# Altium PCB FanControllerPCB_Rev2.PcbDoc
Units mm, origin at the board's own origin, x right, y up, seen from the top; angles counter-clockwise.
Board outline 89.28 x 81.53 mm, 2 copper layers (Top Layer, Bottom Layer); 42 components, 35 nets, 158 pads, 23 vias.
Unrouted connection lines stored in the file: 2.
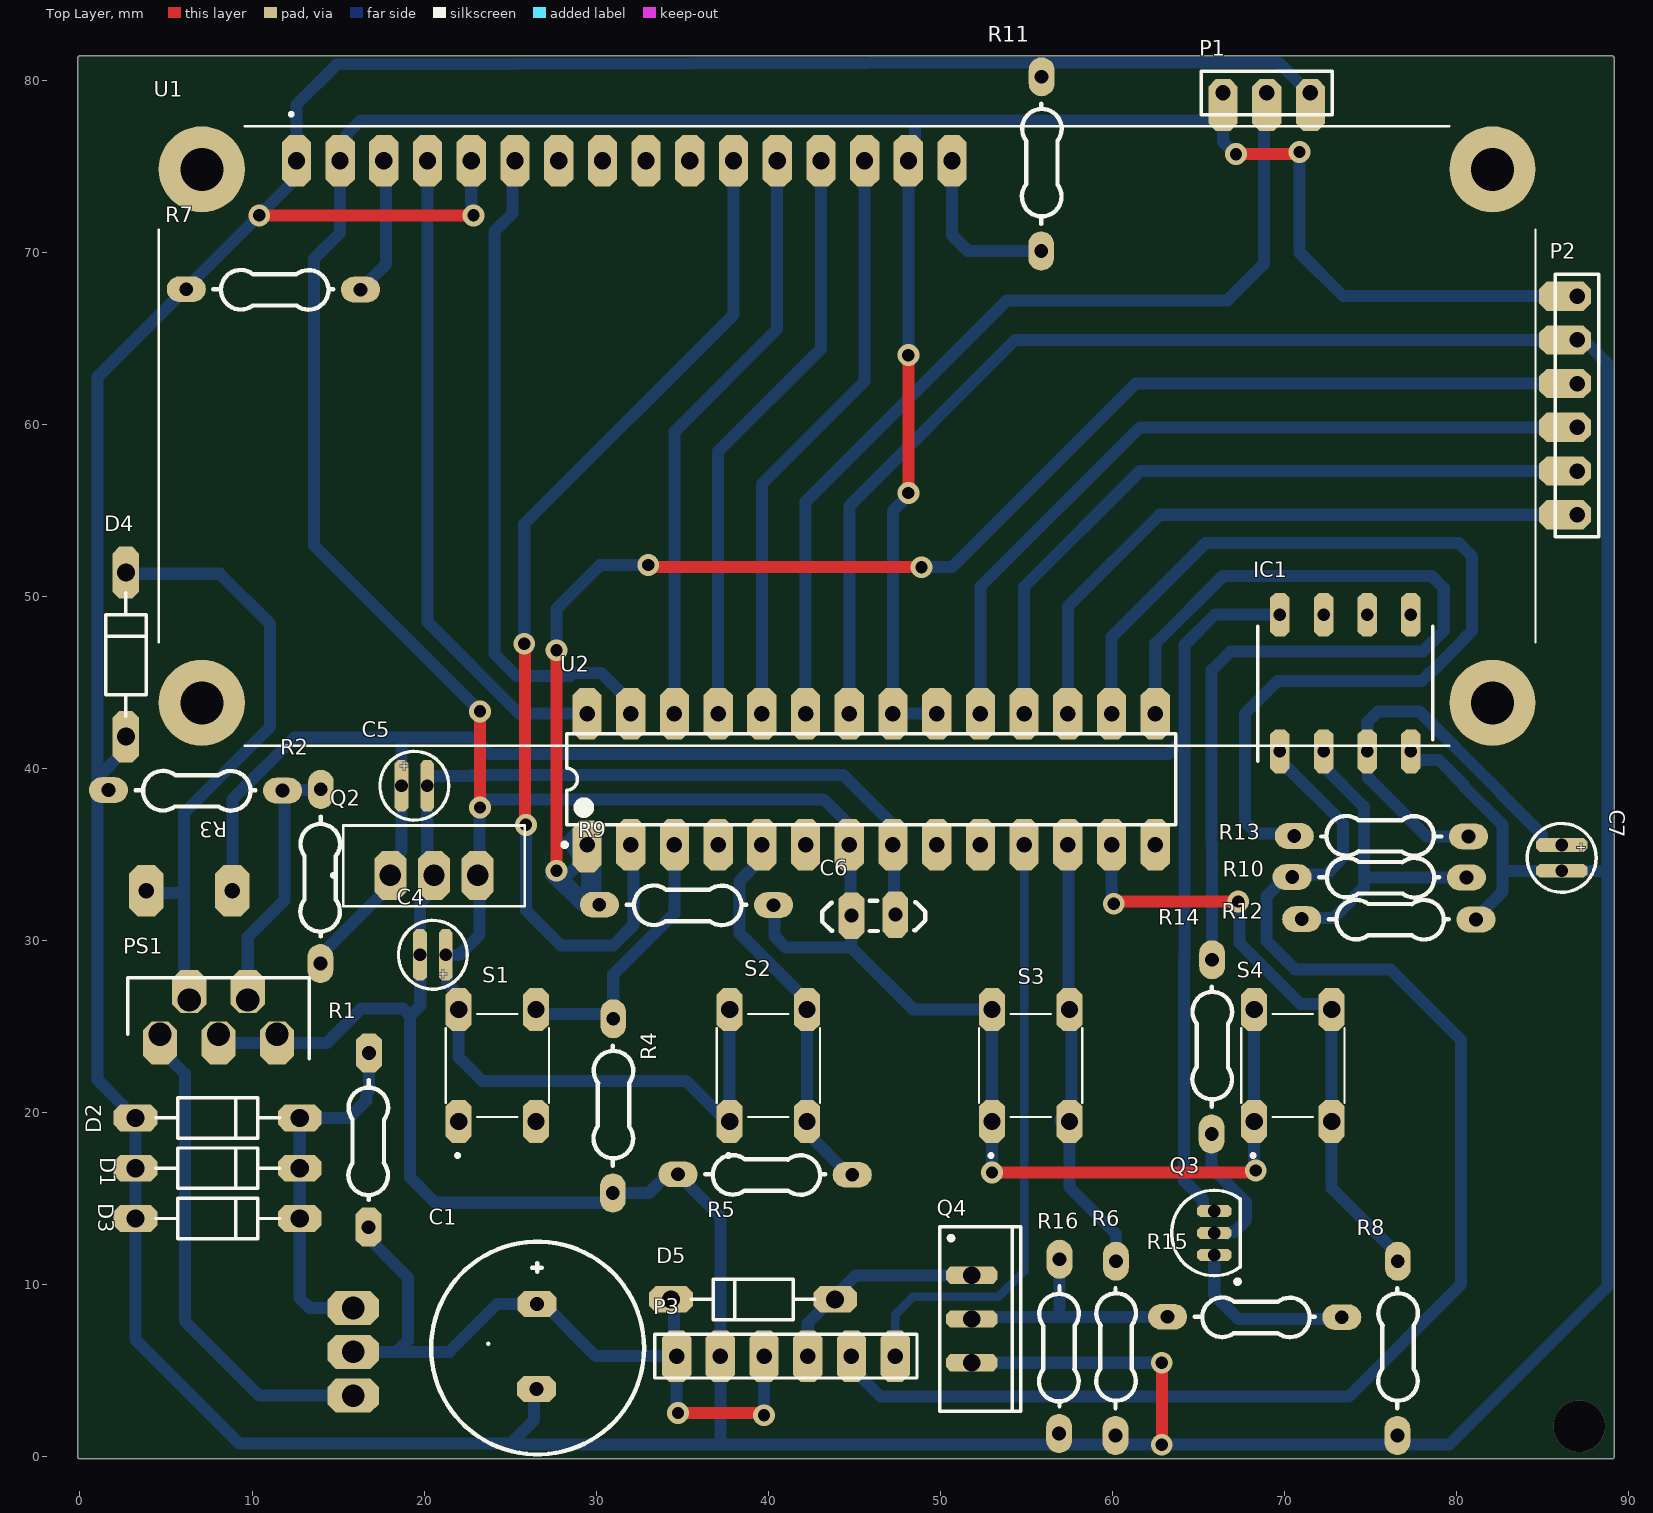
[diagram p0: Top Layer view]
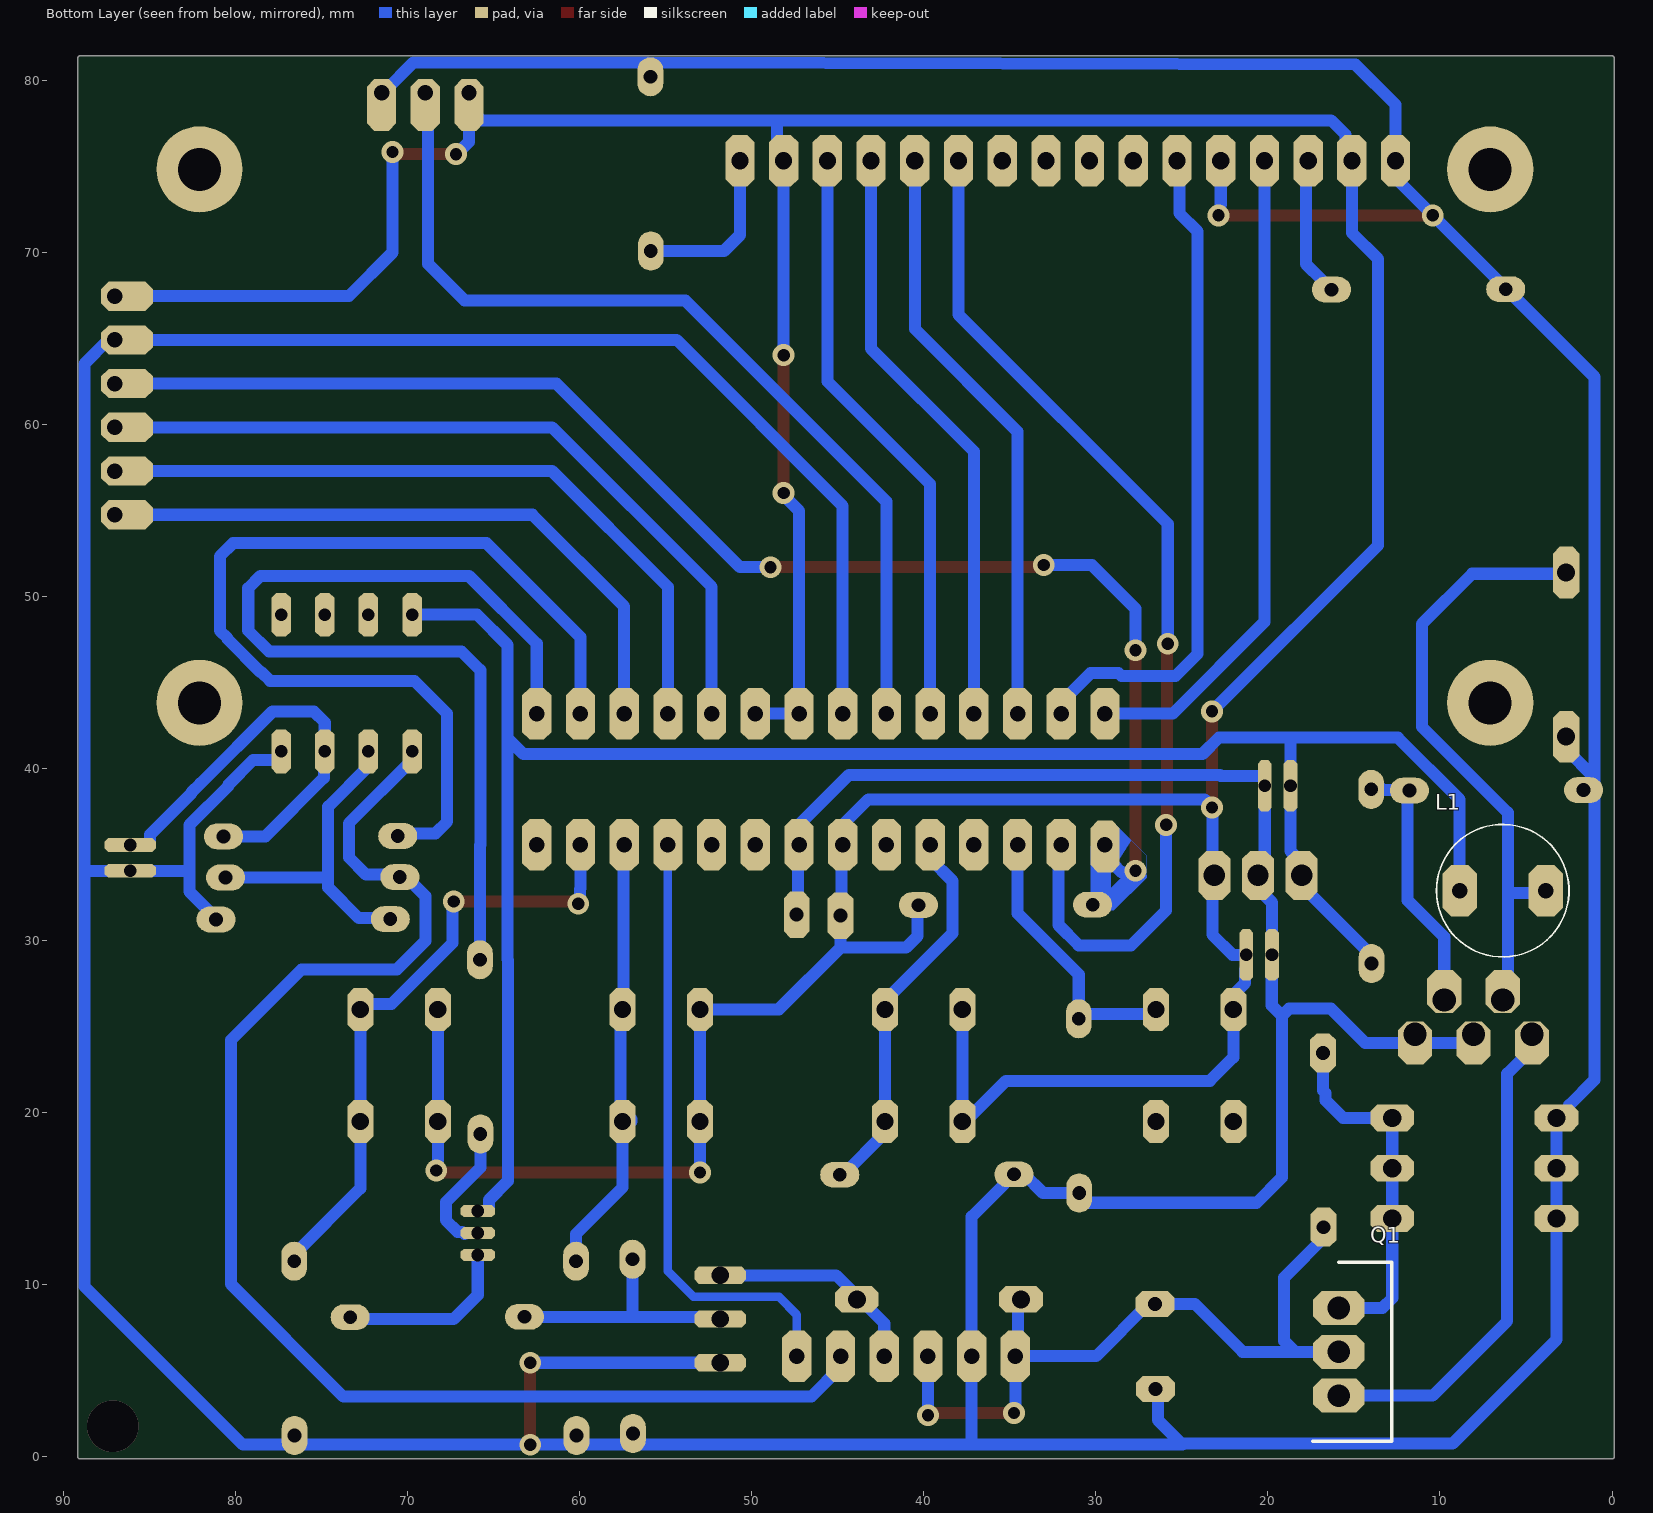
[diagram p1: Bottom Layer view, seen from below]
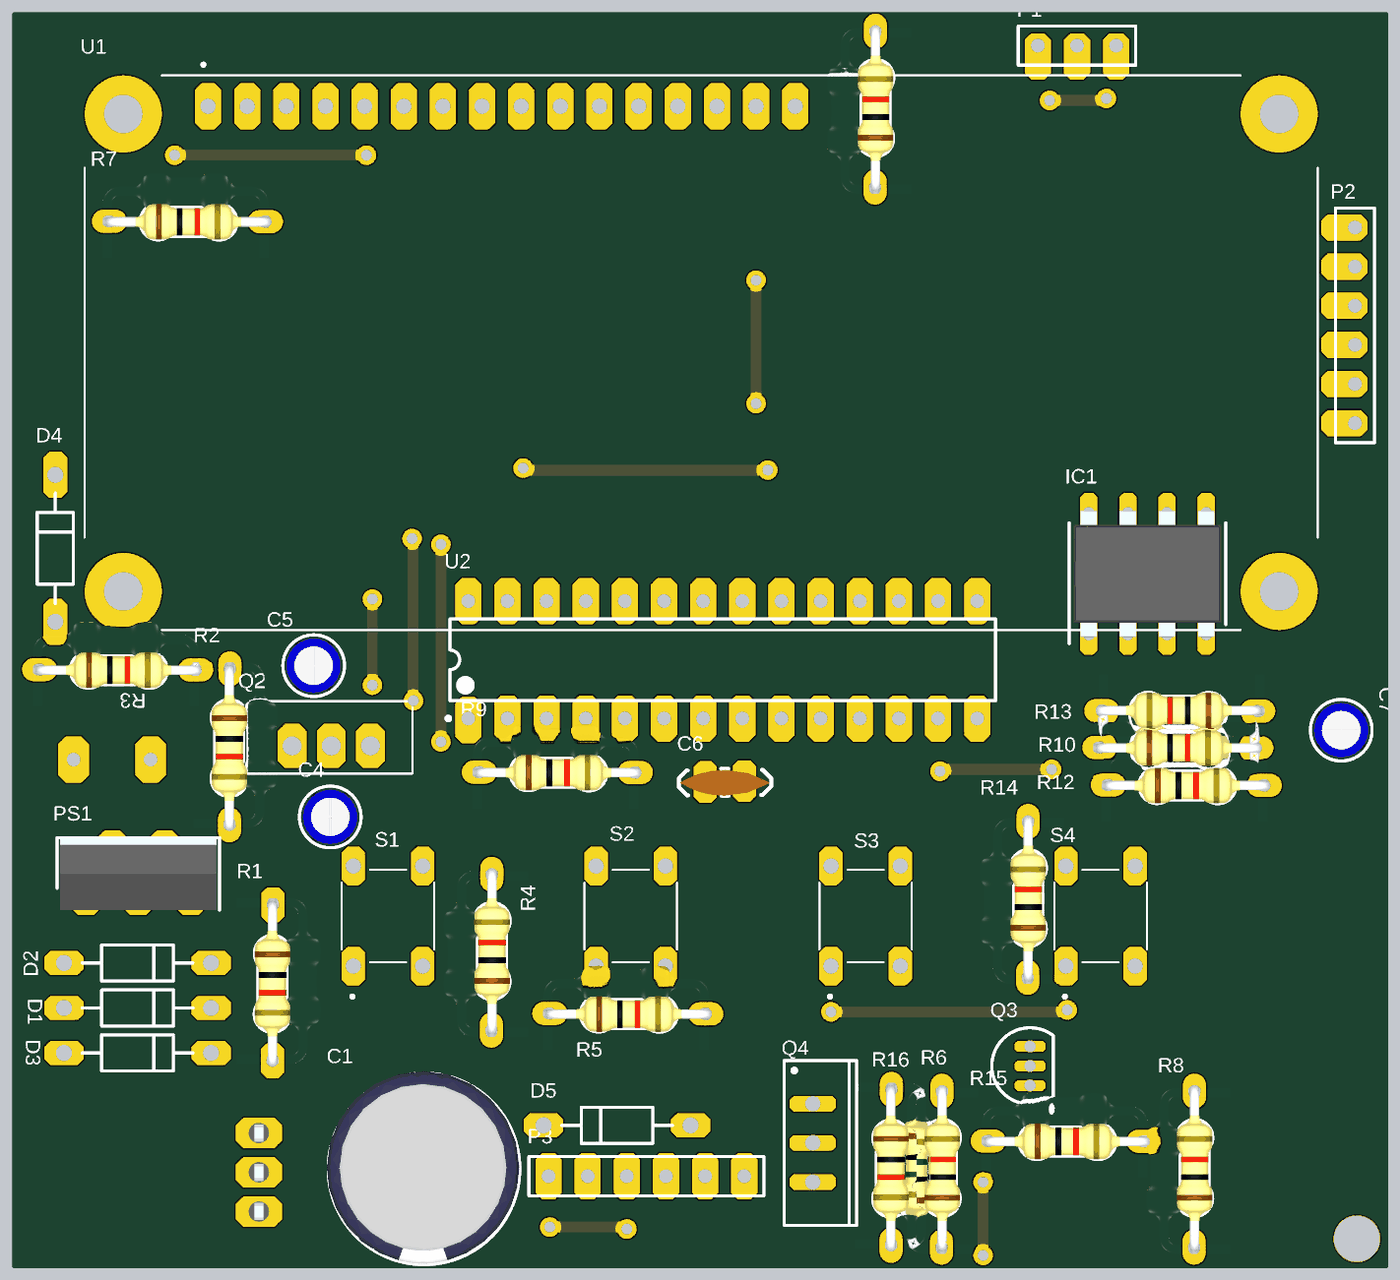
[diagram p2: 3D render of the assembled board from above, using the file's embedded part models]

## Layer stack, top to bottom
Top Solder: solder mask 0.0102, Solder Resist, Dk 3.5
Top Layer: signal copper 0.0356
Dielectric 1: dielectric 0.32, FR-4, Dk 4.8
Bottom Layer: signal copper 0.0356
Bottom Solder: solder mask 0.0102, Solder Resist, Dk 3.5

## Board outline
0,-0.127 cw(c0,0) -0.127,0 -0.127,81.28 cw(c0,81.28) 0,81.407 89.027,81.407 cw(c89.027,81.28) 89.154,81.28 89.154,0 cw(c89.027,0) 89.013,-0.127 cw(c89,0) 89,-0.127

## Design rules (kind name [scope] priority, off if disabled: settings)
Clearance [All] p1: gap=0.5 ignorepadtopadclearanceinfootprint=FALSE
PolygonConnect [All] p1: connectstyle=Relief reliefconductorwidth=0.254 reliefentries=4 polygonreliefangle="90 Angle" airgapwidth=0.254
RoutingVias [All] p1: holewidth=0.711 width=1.27 viastyle="Through Hole" minholewidth=0.711 minwidth=1.27 maxholewidth=0.711 maxwidth=1.27
SolderMaskExpansion [All] p1: expansion=0.102
Width [All] p1: maxlimit=1 minlimit=0.4 preferedwidth=0.7 minimp=50.000000 maximp=50.000000 favimp=50.000000
30 further rules are at their usual default settings.

## Components (designator, comment, footprint, x,y, rotation, side; value= is the part's Value field where it differs from the comment)
C1 "100 μF" "Radial 12.5 x 25" 26.543,6.404 r180 top value="100 µF"
C4 "100 μF" "RADIAL 3.5x7.7" 20.506,29.167 r180 top value="100 µF"
C5 "100 μF" "RADIAL 3.5x7.7" 19.431,38.989 r0 top value="100 µF"
C6 "100 nF" "Ceramic Capacitor 2" 46.101,31.496 r180 top
C7 "100 μF" "RADIAL 3.5x7.7" 86.106,34.798 r270 top value="100 µF"
D1 "Diode Zener" ONSC-AXIAL_LEAD-2-59-10_P#1 8.001,16.764 r180 top
D2 "Diode Zener" ONSC-AXIAL_LEAD-2-59-10_P#1 8.001,19.685 r180 top
D3 "Diode Zener" ONSC-AXIAL_LEAD-2-59-10_P#1 8.001,13.843 r180 top
D4 "1N5822" ONSC-AXIAL_LEAD-2-59-10_P#2 2.667,46.609 r270 top
D5 "1N5822" ONSC-AXIAL_LEAD-2-59-10_P#1 39.116,9.144 r0 top
IC1 "LM358PE4" DIP794W53P254L959H508Q8N 73.533,44.958 r90 top
L1 "WE-FI, 7447018" TSL0709RA-102KR19-PF 6.35,32.893 r0 bottom value=150µH
P1 "Header 3" HDR1X3 66.421,79.248 r0 top
P2 "Header 6" HDR1X6#1 86.995,54.737 r90 top
P3 "Header 6" HDR1X6#2 34.671,5.842 r0 top
PS1 "LM2576-12WT" TO170P470X1016X1900-5P 4.65,24.543 r0 top
Q1 "TIP122" TO255P460X1020X2008-3P 15.875,8.646 r270 bottom
Q2 "LM7805CT/NOPB" TO254P1054X470X2600-3 18.034,33.782 r0 top
Q3 "2N3904" TO-92A 65.913,12.999 r0 top
Q4 "MOSFET-N" TO-220AB 51.816,8.001 r270 top
R1 "Res_Com" "1K Ohm"#1 16.764,18.34 r270 top
R2 "Res_Com" "1K Ohm"#2 13.97,33.655 r270 top
R3 "Res_Com" "1K Ohm"#2 6.776,38.71 r0 top
R4 "Res_Com" "1K Ohm"#2 30.988,20.447 r90 top
R5 "Res_Com" "1K Ohm"#2 39.878,16.383 r0 top
R6 "Res_Com" "1K Ohm"#2 60.198,6.362 r90 top
R7 "Res_Com" "1K Ohm"#2 11.303,67.818 r0 top
R8 "Res_Com" "1K Ohm"#2 76.581,6.362 r90 top
R9 "Res_Com" "1K Ohm"#2 35.306,32.051 r0 top
R10 "Res_Com" "1K Ohm"#2 75.565,33.655 r0 top
R11 "Res_Com" "1K Ohm"#2 55.88,75.185 r90 top
R12 "Res_Com" "1K Ohm"#2 76.118,31.217 r0 top
R13 "Res_Com" "1K Ohm"#2 75.565,36.068 r180 top
R14 "Res_Com" "1K Ohm"#2 65.786,23.876 r90 top
R15 "Res_Com" "1K Ohm"#2 68.326,8.106 r0 top
R16 "Res_Com" "1K Ohm"#2 56.896,6.35 r270 top
S1 "1825967-1" SW_1825967-1 24.257,22.733 r90 top
S2 "1825967-1" SW_1825967-1 40.005,22.733 r90 top
S3 "1825967-1" SW_1825967-1 55.245,22.733 r90 top
S4 "1825967-1" SW_1825967-1 70.485,22.733 r90 top
U1 "LCD2X16" LCD_LCD2X16 44.577,59.309 r0 top
U2 "ATmega8A-PU" 28P3 45.974,39.37 r90 top

## Footprints (in the part's own frame and the unit in brackets; to place one, negate y for a bottom-side part, rotate by r counter-clockwise, add the part's x,y. Pads: shape width x height; smd on the part's side, far side on the other; paste and mask are expansions set on the pad)
"1K Ohm"#1 [mm] "RESISTENCIA DE 1/4 W DE 1K OHM"
  oct 2.27x1.5 hole 0.8: 1(-5.125,0.025) 2(5,0)
  silkscreen extent -3.55,-1.17 3.42,1.14, body extent -5.56,-2.35 5.38,3.13, height 2.93
"1K Ohm"#2 [mm] "RESISTENCIA DE 1/4 W DE 1K OHM"
  oval 2.27x1.5 hole 0.8: 1(-5.125,0.025) 2(5,0)
  silkscreen extent -3.55,-1.17 3.42,1.14, body extent -5.56,-2.35 5.38,3.13, height 2.93
28P3 [mm] "28-Pin Plastic Dual In-Line Package (PDIP)"
  oct 3x1.7 hole 0.9 copper offset -0.1,0: 1(-3.81,16.51)
  oct 3x1.7 hole 0.9: 2(-3.81,13.97) 3(-3.81,11.43) 4(-3.81,8.89) 5(-3.81,6.35) 6(-3.81,3.81) 7(-3.81,1.27) 8(-3.81,-1.27) 9(-3.81,-3.81) 10(-3.81,-6.35) 11(-3.81,-8.89) 12(-3.81,-11.43) 13(-3.81,-13.97) 14(-3.81,-16.51) 15(3.81,-16.51) 16(3.81,-13.97) 17(3.81,-11.43) 18(3.81,-8.89) 19(3.81,-6.35) 20(3.81,-3.81) 21(3.81,-1.27) 22(3.81,1.27) 23(3.81,3.81) 24(3.81,6.35) 25(3.81,8.89) 26(3.81,11.43) 27(3.81,13.97) 28(3.81,16.51)
  silkscreen extent -3.93,-17.7 2.65,17.93, body extent -3.6,-17.65 3.6,17.65, height 4.58
"Ceramic Capacitor 2" [mm] "CAPACITOR CERAMICO"
  oct 1.5x2.7 hole 0.813: 1(-1.276,0) 2(1.264,0.054)
  silkscreen extent -3.03,-0.8 2.98,0.95, body extent -2.93,-0.74 2.91,0.96, height 6.92
DIP794W53P254L959H508Q8N [mm]
  oct 2.55x1.13 hole 0.73: 1(-3.97,3.81) 2(-3.97,1.27) 3(-3.97,-1.27) 4(-3.97,-3.81) 5(3.97,-3.81) 6(3.97,-1.27) 7(3.97,1.27) 8(3.97,3.81)
  silkscreen extent -4.53,-5.08 3.3,5.08, body extent -4.1,-4.79 4.1,4.79, height 5.08
HDR1X3 [mm] "Connector; Header; 3 Position"
  oct 1.7x3 hole 0.9 copper offset 0,-0.7: 1(0,0) 2(2.54,0) 3(5.08,0)
  silkscreen extent -1.27,-1.27 6.35,1.27
HDR1X6#1 [mm] "Connector; Header; 6 Position"
  oct 1.7x3 hole 0.9 copper offset 0,0.7: 1(0,0) 2(2.54,0) 3(5.08,0) 4(7.62,0) 5(10.16,0) 6(12.7,0)
  silkscreen extent -1.27,-1.27 13.97,1.27
HDR1X6#2 [mm] "Connector; Header; 6 Position"
  oct 1.7x3 hole 0.9: 1(0,0) 2(2.54,0) 3(5.08,0) 4(7.62,0) 5(10.16,0) 6(12.7,0)
  silkscreen extent -1.27,-1.27 13.97,1.27
LCD_LCD2X16 [mm]
  oct 1.7x3 hole 1: 1(-32,16) 2(-29.46,16) 3(-26.92,16) 4(-24.38,16) 5(-21.84,16) 6(-19.3,16) 7(-16.76,16) 8(-14.22,16) 9(-11.68,16) 10(-9.14,16) 11(-6.6,16) 12(-4.06,16) 13(-1.52,16) 14(1.02,16) 15(3.56,16) 16(6.1,16)
  round 5 hole 2.5: S1(-37.5,15.5) S2(37.5,15.5) S3(37.5,-15.5) S4(-37.5,-15.5)
  silkscreen extent -40,-18 40,18.8
ONSC-AXIAL_LEAD-2-59-10_P#1 [mm] "AXIAL, 2-Leads, Diameter 2.35mm"
  oct 2.55x1.55 hole 1.05: 1(-4.77,0) 2(4.77,0)
  silkscreen extent -3.59,-1.17 3.59,1.17
ONSC-AXIAL_LEAD-2-59-10_P#2 [mm] "AXIAL, 2-Leads, Diameter 2.35mm"
  oct 3x1.55 hole 1.05: 1(-4.77,0) 2(4.77,0)
  silkscreen extent -3.59,-1.17 3.59,1.17
"RADIAL 3.5x7.7" [mm] "Capacitor  Electrolitico Radial 3.5mm diametro  x 7.7mm de altura (1.5mm entre pines)"
  oct 0.8x3 hole 0.75: 1(-0.75,0) 2(0.75,0)
  silkscreen extent -2,-2 2,2, body extent -1.78,-1.78 1.77,1.77, height 8.53
"Radial 12.5 x 25" [mm] "Capacitor  Electrolitico Radial 12.5mm diametro  x 25mm de altura (5mm entre pines)"
  oct 2.27x1.5 hole 0.8: 1(-0.012,-2.476) 2(0.013,2.477)
  silkscreen extent -6.24,-6.1 6.14,6.27, body extent -6.24,-6.26 6.26,6.24, height 26.49
SW_1825967-1 [mm]
  oct 2.508x1.508 hole 1: 1(-3.25,2.25) 2(3.25,2.25) 3(-3.25,-2.25) 4(3.25,-2.25)
  silkscreen extent -5.33,-3 3,3
TO170P470X1016X1900-5P [mm]
  oct 2x2.5 hole 1.35 copper offset 0,-0.5: 1(0,0) 3(3.4,0) 5(6.8,0)
  oct 2x2.5 hole 1.35 copper offset 0,0.5: 2(1.7,2) 4(5.1,2)
  silkscreen extent -1.87,-1.42 8.67,3.28, body extent -1.68,-1.42 8.48,3.28, height 17.61
TO254P1054X470X2600-3 [mm]
  oct 1.86x2.86 hole 1.24: 1(0,0) 2(2.54,0) 3(5.08,0)
  silkscreen extent -3.41,-1.8 7.81,2.9
TO255P460X1020X2008-3P [mm]
  oct 1.98x3 hole 1.32: 1(0,0) 2(2.55,0) 3(5.1,0)
  silkscreen extent -2.65,-1.53 7.75,3.07, body extent -2.55,-1.53 7.65,3.07, height 19.21
TO-92A [mm] "TO, Flat Index; 3 In-Line, Axial Leads; Body Dia. 4.5mm; Leads 0.51 x 0.48 mm (max)"
  oct 2x0.7 hole 0.75: 1(0,-1.27) 2(0,0) 3(0,1.27)
  silkscreen extent -2.48,-2.95 1.5,2.48, body extent -2.48,-2.5 1.5,2.5, height 6.86
TO-220AB [mm] "TO, Thru-Hole, Vertical, Heatsink Mounted; 3 In-Line Leads; Pitch 2.54 mm"
  oct 1x3 hole 1: 1(-2.54,0) 2(0,0) 3(2.54,0)
  silkscreen extent -5.35,-1.85 5.35,2.85, body extent -5.4,-1.9 5.4,2.9, height 19.3
TSL0709RA-102KR19-PF [mm]
  oct 2x3 hole 0.89: 1(-2.5,0) 2(2.5,0)
  silkscreen extent -3.85,-3.85 3.85,3.85

## Part data
C1 C4 C5 C7: library part "Electrolitic Capacitor, Thru-Hole", "Electrolitic Capacitor, Thru-Hole", Contact=cynetik_group@hotmail.com, Created by="Zion Blue", Published="28 April 2014", Publisher="Cynetik Group"
C6: library part "Ceramic Capacitor, Thru-Hole.", "Ceramic Capacitor, Thru-Hole", Contact=cynetik_group@hotmail.com, Created by="Zion Blue", Published="28 April 2014", Publisher="Cynetik Group"
D4 D5: "Diode", Manufacturer_Name="HY Electronic Corp", Datasheet Link=https://docs.rs-online.com/7b99/0900766b814bbef7.pdf, Manufacturer_Part_Number=1N5822
IC1: "Integrated Circuit", Manufacturer_Name="Texas Instruments", Mouser Part Number=595-LM358PE4, Arrow Part Number=LM358PE4, Arrow Price/Stock=https://www.arrow.com/en/products/lm358pe4/texas-instruments, Datasheet Link=http://www.ti.com/lit/ds/symlink/lm358.pdf, Height=5.08mm, Manufacturer_Part_Number=LM358PE4, Mouser Price/Stock=https://www.mouser.co.uk/ProductDetail/Texas-Instruments/LM358PE4?qs=VBduBm9rCJTWtuRHSrRjAg%3D%3D
L1: "WE-FI Leaded Toroidal Line Choke, L = 150µH", Manufacturer="Wurth Elektronik", partNo=7447018, ComponentLink1Description=Manufacturer, ComponentLink1URL=http://www.we-online.de, ComponentLink2Description=Datasheet, ComponentLink2URL=http://katalog.we-online.de/pbs/datasheet/7447018.pdf, Created by="Baojun Chen", Created Date=Feb.2016
P1: "Header, 3-Pin", LatestRevisionDate=17-Jul-2002, LatestRevisionNote="Re-released for DXP Platform.", Publisher="Altium Limited"
P2 P3: "Header, 6-Pin", LatestRevisionDate=17-Jul-2002, LatestRevisionNote="Re-released for DXP Platform.", Publisher="Altium Limited"
PS1: "Power Supply", Manufacturer_Name=Microchip, Mouser Part Number=998-LM2576-12WT, Arrow Part Number=LM2576-12WT, Arrow Price/Stock=https://www.arrow.com/en/products/lm2576-12wt/microchip-technology, Datasheet Link=http://ww1.microchip.com/downloads/en/DeviceDoc/lm2576.pdf, Height=4.7mm, Manufacturer_Part_Number=LM2576-12WT, Mouser Price/Stock=https://www.mouser.co.uk/ProductDetail/Microchip-Technology-Micrel/LM2576-12WT?qs=kh6iOki%2FeLFUlIqd4u5Ybw%3D%3D
Q1: "Transistor BJT NPN", Manufacturer_Name=STMicroelectronics, Mouser Part Number=511-TIP122, Arrow Part Number=TIP122, Arrow Price/Stock=https://www.arrow.com/en/products/tip122/stmicroelectronics, Datasheet Link=http://www.st.com/web/en/resource/technical/document/datasheet/CD00000911.pdf, Height=4.6mm, Manufacturer_Part_Number=TIP122, Mouser Price/Stock=https://www.mouser.co.uk/ProductDetail/STMicroelectronics/TIP122?qs=ljbEvF4DwOPuWPwhe20bIQ%3D%3D
Q2: "Linear Voltage Regulator IC 1 Output 1A TO-220-3", Package="TO-220 ON Semiconductor", Availability=Unavailable, MF="ON Semiconductor", MP=LM7805CT, Price=None, SnapEDA_Link=https://www.snapeda.com/parts/LM7805CT/ON%20Semiconductor/view-part/546231/?ref=snap
Q3: "NPN General Purpose Amplifier", ComponentLink1Description="Manufacturer Link", ComponentLink1URL=http://www.fairchildsemi.com/, ComponentLink2Description=Datasheet, ComponentLink2URL=http://www.fairchildsemi.com/ds/2N%2F2N3904.pdf, DatasheetVersion=1997, LatestRevisionDate=15-Jan-2003, LatestRevisionNote="PCB Footprint 'BCY-W3/D4.7' replaced", PackageDescription="TO, Flat Index; 3 In-Line, Axial Leads; Body Dia. 4.5mm; Leads 0.51 x 0.48 mm (max)", PackageReference=TO-92A, PackageVersion=Sep-1998, Published=8-Jun-2000, Publisher="Altium Limited"
Q4: "N-Channel MOSFET", LatestRevisionDate=17-Jul-2002, LatestRevisionNote="Re-released for DXP Platform.", PackageDescription="TO, Flat Index; 3 In-Line, Axial Leads; Body Dia. 4.6mm; Lead Dia. 0.5 mm (max)", PackageReference=E3, PackageVersion=1995/1996, Published=8-Jun-2000, Publisher="Altium Limited"
S1 S2 S3 S4: "Switch Tactile OFF (ON) SPST Round Button PC Pins 0.05A 24VDC 1.57N Thru-Hole", Package=None, Availability=Warning, BuyPart=https://www.snapeda.com/parts/1825967-1/TE%20Connectivity%20/%20DEUTSCH/view-part/398388/?ref=eda, DigiKey-Purchase-URL=https://snapeda.com/shop?store=DigiKey&id=398388, MF="TE Connectivity", Mouser-Purchase-URL=https://snapeda.com/shop?store=Mouser&id=398388, MP=1825967-1, Price=None, SnapEDA_Link=https://www.snapeda.com/parts/1825967-1/TE%20Connectivity%20/%20DEUTSCH/view-part/398388/?ref=snap
U1: "Display; Display: LCD 2x16 characters (blue backlight)", Package=None, Availability=Unavailable, MF=mikroElektronika, MP=LCD2X16, Price=None, SnapEDA_Link=https://www.snapeda.com/parts/LCD2X16/mikroElektronika/view-part/2472530/?ref=snap
U2: "8-bit AVR Microcontroller, 2.7-5.5V, 16MHz, 8KB Flash, 512 Bytes EEPROM, 1KB SRAM, 28-pin PDIP, Industrial Grade (-40°C to 85°C)", ComponentLink1Description="Manufacturer URL", ComponentLink1URL=http://www.atmel.com/, ComponentLink2Description="ATmega8A Datasheet", ComponentLink2URL=http://www.atmel.com/dyn/resources/prod_documents/doc8159.pdf, ComponentLink3Description="ATmega8A Summary", ComponentLink3URL=http://www.atmel.com/dyn/resources/prod_documents/8159S.pdf, DatasheetVersion="revD, Feb-2011", PackageDescription="28-lead (0.300\"/7.62mm Wide) Plastic Dual Inline Package (PDIP)", PackageReference=28P3, PackageVersion="revB, Sep-2001"

## Via types
v1: diameter 1.27, hole 0.711, Top Layer to Bottom Layer, 22 vias
v2: diameter 3, hole 3, Top Layer to Bottom Layer, 1 vias

## Nets (pads, with @x,y where several pads share a name; then routed paths per layer and width w, separated by ;. In a path a pad name is that pad's centre, name@x,y a point inside that pad or via, vN(x,y) a via of type N, cw(c..) or ccw(c..) an arc to the next point about the centre after c; other vN are vias at no path point)
12V: C5.1 IC1.8 L1.2 Q2.1 Q3.3 R2.2 | length 118.3
  Bottom Layer w0.7: L1.2 8.85,38.187 12.446,41.783 16.891,41.783 18.669,41.783 ; R2.2 13.97,29.129 14.097,29.256 18.034,33.193 Q2.1 18.034,34.542 18.681,35.189 C5.1 18.681,41.771 18.669,41.783 ; Q3.3 65.263,14.269 65.263,14.919 64.161,16.021 64.161,28.875 64.184,28.898 64.184,41.753 ; IC1.8 65.946,48.928 64.184,47.166 64.184,41.753 ; 18.669,41.783 22.845,41.783 23.798,40.83 63.261,40.83 64.184,41.753
+5V: C4.1 C6.2 P1.1 P2.6 Q2.3 R9.2 S1.1 S1.2 S2.1 S2.2 S3.1 S3.2 S4.1 S4.2 U1.2 U1.15 U2.7 U2.20 U2.21 | length 283.5
  Top Layer w0.7: v1(23.241,37.726) v1(23.241,43.314) ; v1(48.137,56.007) v1(48.137,64.012) ; v1(52.995,16.51) 68.199,16.51 v1(68.326,16.637) ; v1(67.183,75.692) 70.358,75.692 70.376,75.71 70.757,75.71 v1(70.866,75.819)
  Bottom Layer w0.7: C4.1 22.055,29.167 23.222,30.334 23.222,33.782 v1@23.222,37.745 ; C4.1@21.324,28.321 21.324,27.519 22.007,26.836 S1.2 22.007,23.205 23.368,21.844 35.214,21.844 37.755,19.303 S2.1@37.755,18.975 ; v1(23.241,37.726) v1@23.222,37.745 ; v1(23.241,43.314) 13.589,52.966 13.589,69.596 15.117,71.124 U1.2 15.498,75.69 15.498,76.839 16.318,77.659 48.518,77.659 ; S2.1 S2.2 ; R9.2 40.361,31.996 40.361,30.251 41.021,29.591 44.837,29.591 ; U2.7 44.77,35.494 44.77,31.509 C6.2 44.837,29.591 ; U2.7@44.704,36.068 44.704,36.718 43.219,38.203 23.68,38.203 v1@23.222,37.745 ; v1(48.137,56.007) 48.137,55.853 47.244,54.96 U2.21 U2.20 ; v1(48.137,64.012) U1.15 48.518,75.69 48.518,77.659 ; v1(52.995,16.51) S3.1 S3.2 48.41,25.983 48.41,26.012 44.837,29.585 44.837,29.591 ; P1.1@66.267,78.245 65.681,77.659 48.518,77.659 ; P1.1@66.575,78.118 66.575,79.094 P1.1 66.421,76.409 67.138,75.692 v1(67.183,75.692) ; S4.2 S4.1 68.235,17.236 v1(68.326,16.637) ; v1(70.866,75.819) 70.866,69.977 73.406,67.437 P2.6
+48V: C1.1 D5.1 P3.1 P3.3 Q1.2 R1.2 | length 44.6
  Top Layer w0.7: v1(34.753,2.54) 39.624,2.54 v1(39.751,2.413)
  Bottom Layer w0.7: Q1.2 18.415,6.096 ; R1.2@16.51,12.955 19.05,10.415 19.05,6.731 18.415,6.096 ; D5.1 34.509,8.981 34.509,6.004 P3.1 ; v1(34.753,2.54) 34.671,2.622 P3.1 ; v1(39.751,2.413) P3.3 ; 18.415,6.096 21.463,6.096 24.247,8.88 C1.1 26.94,8.88 29.979,5.842 P3.1
-48V: C1.2 C4.2 C5.2 C6.1 C7.2 D1.2 D2.2 D3.2 D4.2 IC1.4 P1.3 P2.5 P3.2 PS1.3 PS1.5 Q2.2 Q4.3 R3.1 R4.1 R5.1 R6.1 R7.1 R8.1 R11.2 R12.2 R16.2 U1.1 U1.5 U2.8 U2.22 | length 506.6
  Top Layer w0.7: v1(10.414,72.136) v1(22.86,72.136) ; v1(62.865,0.698) v1(62.865,5.461)
  Bottom Layer w0.7: R3.1 R3.1@1.016,38.735 ; D4.2 2.667,41.114 1.016,39.463 ; PS1.3 8.55,24.043 10.95,24.043 PS1.5 11.95,24.043 14.34,24.043 16.332,26.035 18.767,26.035 19.177,25.625 ; C4.2 19.756,32.204 20.574,33.022 Q2.2 20.181,34.175 C5.2 20.181,39.518 20.231,39.568 22.737,39.568 22.787,39.618 44.344,39.618 47.244,36.718 U2.8@47.244,36.068 ; C4.2@19.774,28.321 19.774,26.222 19.177,25.625 ; U1.5 22.737,72.759 22.751,72.745 22.751,72.245 v1(22.86,72.136) ; C1.2 26.384,3.781 26.384,2.127 25.019,0.762 ; U2.22 44.704,55.245 54.356,64.897 P2.5 87.375,64.897 88.772,63.5 88.772,34.163 ; U2.8 47.31,35.494 47.31,31.562 C6.1 ; Q4.3 v1(62.865,5.461) ; 68.58,81.025 69.647,81.025 71.297,79.375 P1.3@71.347,79.375 ; 68.733,81.024 56.033,81.024 14.913,80.898 12.577,78.562 U1.1 12.577,74.299 v1(10.414,72.136) 1.016,62.738 1.016,39.463 ; IC1.4 77.343,40.708 77.558,40.493 78.958,40.493 80.391,39.06 80.391,38.99 82.675,36.706 82.675,33.909 ; R12.2@80.61,31.344 R12.2@80.995,31.344 ; R12.2@80.95,31.115 82.675,32.84 82.675,33.909 ; R3.1@1.016,38.735 1.016,39.463 ; R3.1@1.016,38.735 1.016,21.9 2.488,20.428 2.488,20.11 2.913,19.685 D2.2 D1.2 D3.2 3.231,6.802 9.271,0.762 25.019,0.762 ; 19.177,25.625 19.177,16.232 20.652,14.757 30.567,14.757 30.963,15.153 R4.1 33.066,15.322 34.152,16.408 R5.1 34.922,16.408 35.291,16.038 35.291,15.87 37.211,13.95 P3.2 37.211,0.952 37.465,0.698 ; 25.019,0.762 24.955,0.698 37.465,0.698 ; 37.465,0.698 v1(62.865,0.698) 79.565,0.698 88.772,9.905 88.772,34.163 ; 82.675,33.909 82.814,34.048 C7.2 88.657,34.048 88.772,34.163
Analog: P1.2 U2.23 | length 55
  Bottom Layer w0.7: U2.23 42.164,55.499 53.848,67.183 66.675,67.183 68.807,69.315 P1.2@68.807,79.121 ; P1.2@68.58,79.121 P1.2@68.807,79.121 ; P1.2@68.807,79.375 P1.2@68.807,79.121 ; P1.2@68.834,79.121 P1.2@68.807,79.121
B1: R4.2 S1.3 S1.4 U2.3 | length 16.3
  Bottom Layer w0.7: S1.4 26.775,25.715 30.72,25.715 R4.2 30.988,28.021 34.544,31.577 U2.3
B2: R5.2 S2.3 S2.4 U2.5 | length 22.5
  Bottom Layer w0.7: U2.5 39.624,34.756 38.321,33.453 38.321,30.417 42.255,26.483 S2.4 S2.3 42.255,18.811 44.683,16.383 R5.2
B3: R6.2 S3.3 S3.4 U2.12 | length 25.5
  Bottom Layer w0.7: S3.3@56.987,19.483 S3.3@56.987,19.61 ; U2.12 57.449,35.515 57.449,26.029 S3.4 ; S3.4@57.458,25.912 57.622,25.826 S3.3@57.622,19.483 ; S3.3 57.495,15.657 60.198,12.954 R6.2
B4: R8.2 S4.3 S4.4 U2.13 | length 36.4
  Top Layer w0.7: v1(60.071,32.131) 60.198,32.258 v1(67.31,32.258)
  Bottom Layer w0.7: U2.13 59.944,33.01 59.962,32.992 59.962,32.24 v1(60.071,32.131) ; v1(67.31,32.258) 67.386,32.182 67.386,29.843 70.931,26.298 72.42,26.298 S4.4 S4.3 72.735,15.593 76.581,11.747 R8.2
E: U1.6 U2.27 | length 38.1
  Bottom Layer w0.7: U1.6@25.146,74.469 25.146,72.263 24.077,71.194 24.077,46.659 25.358,45.378 28.516,45.378 28.668,45.53 30.304,45.53 32.004,43.83 U2.27
Gate: R14.2 U2.15 | length 56.5
  Bottom Layer w0.7: U2.15 62.484,47.244 66.421,51.181 78.542,51.181 79.248,50.475 79.248,48.006 78.045,46.803 66.862,46.803 65.761,45.702 65.761,35.56 65.786,35.535 R14.2
LCD4: U1.11 U2.2 | length 61
  Top Layer w0.7: v1(25.818,47.244) 25.863,47.199 25.863,36.763 v1(25.908,36.718)
  Bottom Layer w0.7: v1(25.818,47.244) 25.818,54.206 37.977,66.365 U1.11 ; v1(25.908,36.718) 25.908,31.75 27.94,29.718 30.988,29.718 32.166,30.896 32.166,35.398 U2.2
LCD5: U1.12 U2.26 | length 34.6
  Bottom Layer w0.7: U2.26 34.544,59.563 40.517,65.536 U1.12
LCD6: U1.13 U2.25 | length 34.6
  Bottom Layer w0.7: U2.25 37.084,58.42 43.057,64.393 U1.13
LCD7: U1.14 U2.24 | length 34.6
  Bottom Layer w0.7: U2.24 39.624,56.515 45.597,62.488 U1.14
MISO: P2.2 U2.18 | length 42.5
  Bottom Layer w0.7: U2.18 54.864,50.546 61.595,57.277 P2.2@87.249,57.277
MOSI: P2.1 U2.17 | length 38.3
  Bottom Layer w0.7: U2.17 57.404,49.403 62.738,54.737 P2.1 P2.1@87.249,54.737
NetC7_1: C7.1 IC1.3 R13.1 | length 25.6
  Bottom Layer w0.7: R13.1 78.257,36.043 74.853,39.447 74.853,40.938 IC1.3 74.803,42.672 75.438,43.307 77.841,43.307 82.042,39.106 82.545,38.603 82.545,38.557 84.956,36.146 84.956,35.598 85.006,35.548 C7.1
NetD1_K: D1.1 D2.1 D3.1 Q1.1 R1.1 | length 20.9
  Bottom Layer w0.7: Q1.1 13.335,8.646 12.771,9.21 D3.1 D1.1 D2.1 15.621,19.685 16.637,20.701 16.637,21.128 16.789,21.28 R1.1
NetD4_1: D4.1 L1.1 PS1.2 | length 36
  Bottom Layer w0.7: D4.1 2.667,51.042 2.933,51.308 8.128,51.308 11.049,48.387 11.049,42.418 6.052,37.421 6.052,32.766 6.052,26.841 PS1.2 ; L1.1 3.977,32.766 5.755,32.766
NetD5_2: D5.2 P3.4 Q4.1 | length 12.6
  Bottom Layer w0.7: P3.4 42.291,7.747 45.085,10.541 Q4.1
NetIC1_2: IC1.2 R10.2 R12.1 | length 19.2
  Bottom Layer w0.7: R12.1@70.993,31.293 72.822,31.293 74.606,33.077 74.606,33.655 ; IC1.2 72.263,40.113 74.606,37.77 74.606,33.655 ; R10.2 74.606,33.655
NetPS1_1: PS1.1 Q1.3 | length 28.8
  Bottom Layer w0.7: PS1.1 4.65,23.7 6.096,22.254 6.096,7.874 10.424,3.546 Q1.3
NetPS1_4: PS1.4 R2.1 R3.2 | length 15.5
  Bottom Layer w0.7: PS1.4 9.75,30.197 11.874,32.322 11.874,38.612 R3.2 11.811,38.745 R2.1@13.345,38.745 ; R2.1@13.485,38.885 R2.1@13.345,38.745 ; R2.1 13.96,38.745 R2.1@13.345,38.745
NetQ3_1: Q3.1 R15.2 | length 10.2
  Bottom Layer w0.7: Q3.1 65.913,9.398 67.31,8.001 72.818,8.001 R15.2@73.072,8.255
NetQ3_2: Q3.2 R14.1 | length 7.3
  Bottom Layer w0.7: R14.1 65.761,16.798 67.763,14.796 67.763,13.742 67.09,13.069 66.815,13.069 Q3.2@66.675,12.929
NetQ4_2: Q4.2 R15.1 R16.1 | length 14.6
  Bottom Layer w0.7: Q4.2 51.921,8.106 56.921,8.106 ; R16.1 56.921,8.106 ; R15.1@62.947,8.28 62.773,8.106 56.921,8.106
NetR7_2: R7.2 U1.3 | length 8.3
  Bottom Layer w0.7: R7.2 16.472,67.818 16.841,68.188 16.841,68.356 17.78,69.295 17.78,75.186 U1.3
NetR11_1: R11.1 U1.16 | length 10
  Bottom Layer w0.7: U1.16@50.761,75.393 U1.16 50.677,70.989 51.606,70.06 R11.1
PWM: IC1.1 P3.5 R10.1 | length 83
  Bottom Layer w0.7: P3.5 44.831,5.192 46.531,3.492 73.723,3.492 80.264,10.033 80.264,24.205 76.148,28.321 70.605,28.321 68.961,29.965 68.961,32.586 70.055,33.68 R10.1 70.593,33.833 72.412,33.833 73.406,34.827 73.406,36.805 69.723,40.488 IC1.1
PWM5: R13.2 U2.16 | length 57
  Bottom Layer w0.7: U2.16 59.944,47.625 65.405,53.086 80.137,53.086 80.899,52.324 80.899,48.006 80.448,47.555 80.448,47.509 78.542,45.603 78.496,45.603 77.978,45.085 69.596,45.085 67.691,43.18 67.691,36.902 68.38,36.213 70.42,36.213 R13.2
RS: U1.4 U2.28 | length 38.3
  Bottom Layer w0.7: U1.4 20.197,48.51 25.527,43.18 U2.28
RST: P2.4 R9.1 U2.1 | length 85.9
  Top Layer w0.7: v1(27.686,34.048) v1(27.686,46.863) ; v1(33.02,51.816) 33.147,51.689 v1(48.895,51.689)
  Bottom Layer w0.7: v1(27.686,34.048) 27.795,33.939 28.478,33.939 28.829,34.29 U2.1@28.846,34.29 ; v1(27.686,46.863) 27.686,49.276 30.226,51.816 v1(33.02,51.816) ; U2.1@29.184,35.28 U2.1 29.464,32.793 29.643,32.614 29.643,32.446 30.012,32.076 R9.1 ; v1(48.895,51.689) 50.673,51.689 61.341,62.357 P2.4@87.249,62.357
SCK: P2.3 U2.19 | length 46.1
  Bottom Layer w0.7: U2.19 52.324,50.546 61.595,59.817 P2.3@87.249,59.817
T: P3.6 U2.11 | length 35.7
  Bottom Layer w0.5: P3.6 47.371,8.255 48.407,9.291 53.377,9.291 54.864,10.778 U2.11
pads on no net: IC1.5 IC1.6 IC1.7 U1.7 U1.8 U1.9 U1.10 U1.S1 U1.S2 U1.S3 U1.S4 U2.4 U2.6 U2.9 U2.10 U2.14
copper on no net:
  other v2: 87.122,1.778

## Other copper
Bottom Layer:
  region: 27.305,31.442
  region net RST: 30.72,31.442 28.38,33.782 27.051,33.782 27.051,34.925 28.956,36.83 30.304,35.482 30.304,31.75 28.956,31.75 27.051,33.655 27.051,34.925 27.94,35.814

## Text inside footprints (layer, text, board x,y; h text height)
C4: Top Overlay "+" at 21.395,28.278 h0.5 r180
C5: Top Overlay "+" at 18.542,39.878 h0.5
C7: Top Overlay "+" at 86.995,35.687 h0.5 r270